# Altium PCB PCB-IO-PROTECTION-1.PcbDoc
Units mm, origin at the board's own origin, x right, y up, seen from the top; angles counter-clockwise.
Board outline 40 x 25 mm, 2 copper layers (Top Layer, Bottom Layer); 6 components, 7 nets, 30 pads, 30 vias.
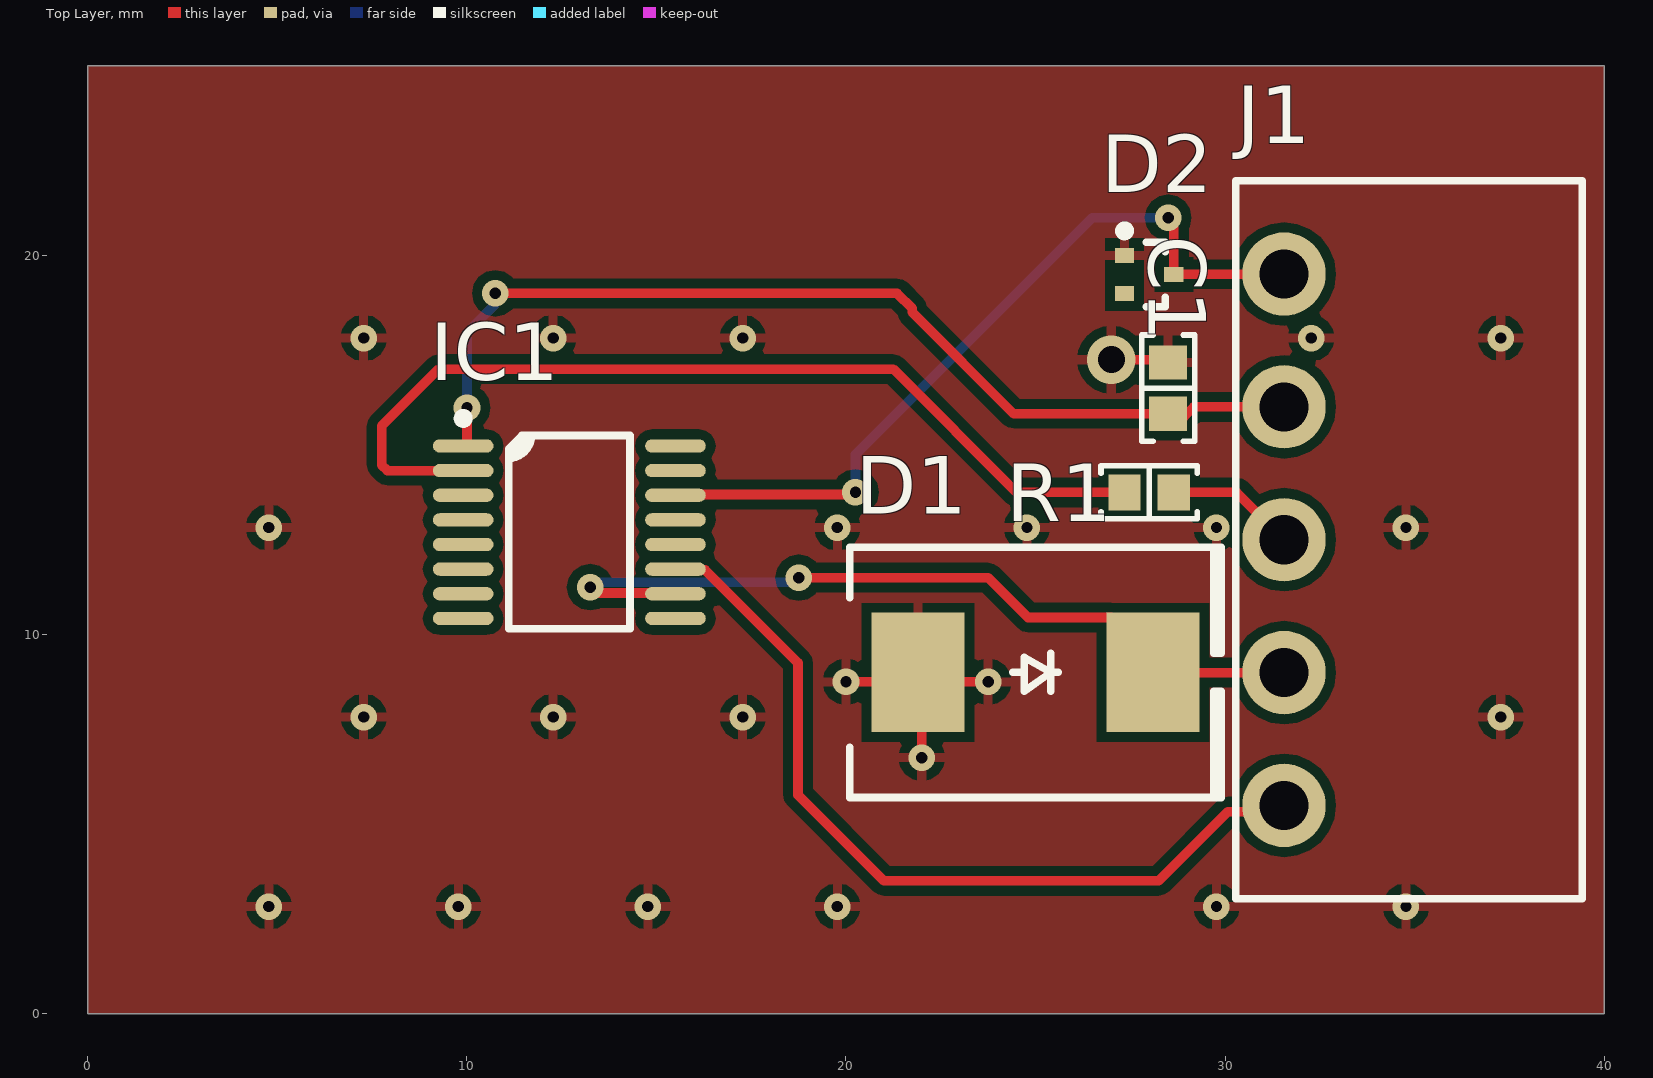
[diagram p0: Top Layer view]
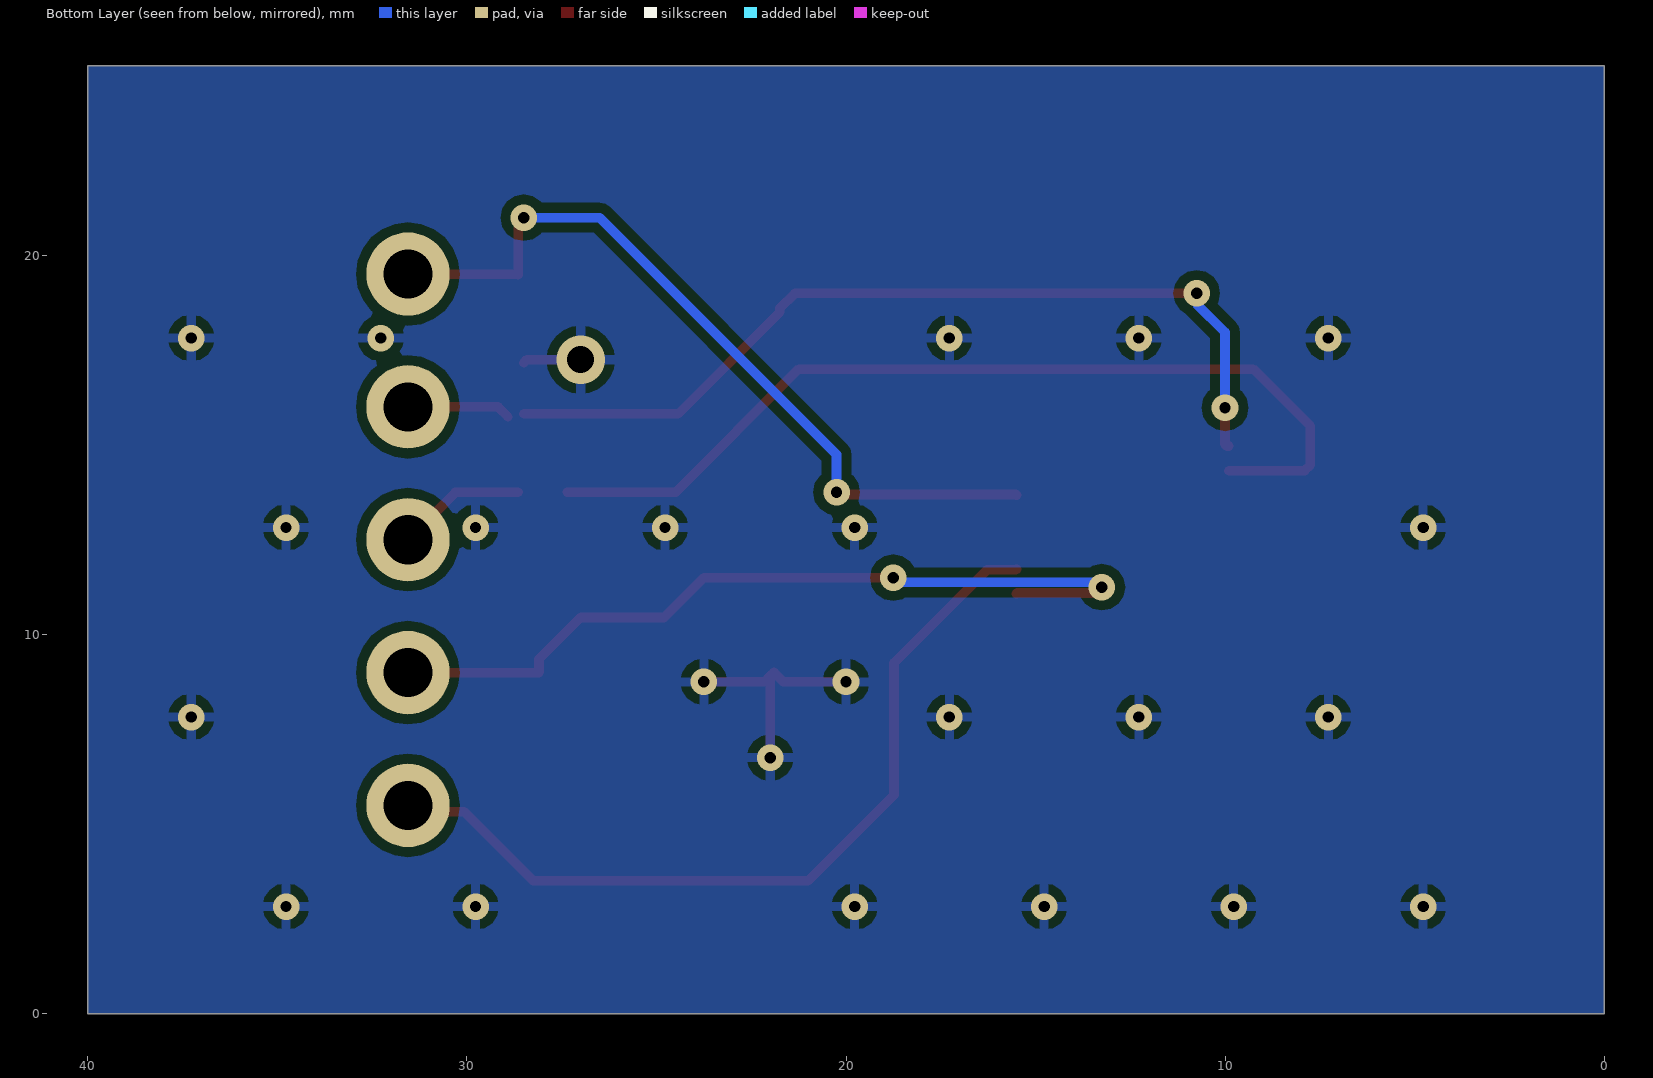
[diagram p1: Bottom Layer view, seen from below]
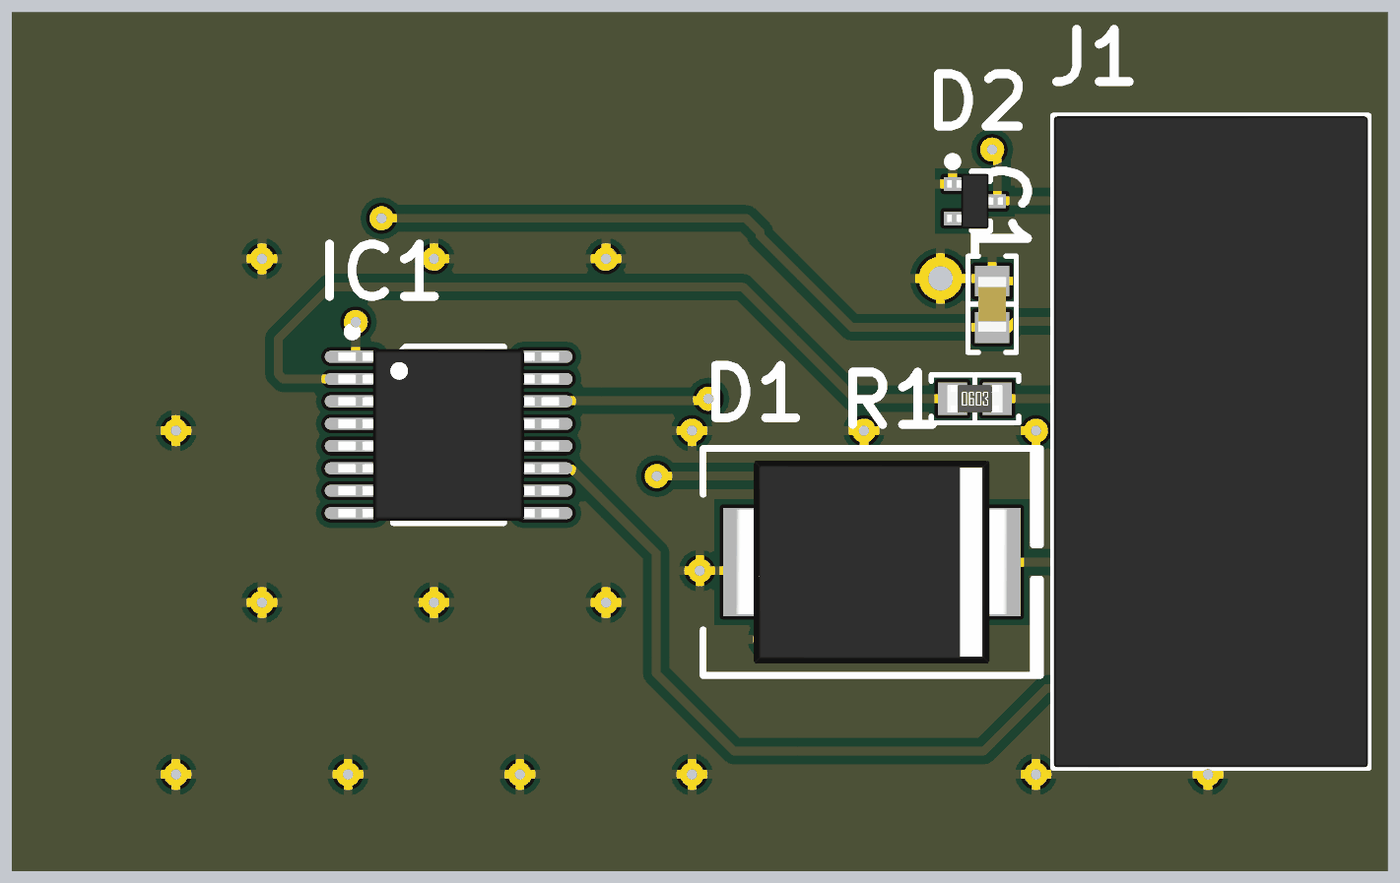
[diagram p2: 3D render of the assembled board from above, using the file's embedded part models]

## Layer stack, top to bottom
Top Solder: solder mask 0.0102, Solder Resist, Dk 3.5
Top Layer: signal copper 0.0356
Dielectric 1: dielectric 0.32, FR-4, Dk 4.8
Bottom Layer: signal copper 0.0356
Bottom Solder: solder mask 0.0102, Solder Resist, Dk 3.5

## Board outline
0,0 0,25 40,25 40,0

## Design rules (kind name [scope] priority, off if disabled: settings)
Clearance [All] p1: gap=0.254 ignorepadtopadclearanceinfootprint=FALSE except(0: Arc-Hole Track-Hole SMDPad-Hole THPad-Hole Via-Hole Fill-Hole Poly-Hole Region-Hole Text-Hole)
PolygonConnect [All] p1: connectstyle=Relief reliefconductorwidth=0.254 reliefentries=4 polygonreliefangle="90 Angle" airgapwidth=0.254
RoutingVias [All] p1: holewidth=0.711 width=1.27 viastyle="Through Hole" minholewidth=0.711 minwidth=1.27 maxholewidth=0.711 maxwidth=1.27
SolderMaskExpansion [All] p1: expansion=0.102 istentingtop=FALSE
Width [All] p1: maxlimit=0.254 minlimit=0.254 preferedwidth=0.254
30 further rules are at their usual default settings.

## Components (designator, comment, footprint, x,y, rotation, side; value= is the part's Value field where it differs from the comment)
C1 "1 µF" "CAP 0603_1608" 28.5,16.5 r270 top
D1 "5.0SMDJ130CA" "DO214AB SMC" 25,9 r0 top
D2 "BZX84C6V8T-7-F" "DIODES SOT-523" 28,19.5 r0 top
IC1 "ADS1120IPWR" "TI TSSOP-16 PW" 12.7,12.7 r0 top
J1 "0395021005" "MOLEX 395021005" 34.859,12.5 r270 top
R1 "360 Ohms" "RES 0603_1608" 28,13.75 r0 top

## Footprints (in the part's own frame and the unit in brackets; to place one, negate y for a bottom-side part, rotate by r counter-clockwise, add the part's x,y. Pads: shape width x height; smd on the part's side, far side on the other; paste and mask are expansions set on the pad)
"CAP 0603_1608" [mm] "Chip Capacitor, 2-Leads, Body 1.60x0.80mm, IPC Medium Density"
  rect 0.9x1 smd: 1(-0.675,0) 2(0.675,0)
  silkscreen extent -1.4,-0.7 1.4,0.7, body extent -0.8,-0.41 0.8,0.41, height 0.82
"DIODES SOT-523" [mm] "SOT523, 3-Leads, Body 0.8x1.60mm, Pitch 0.50mm, IPC Medium Density"
  rect 0.51x0.4 smd: 1(-0.65,0.5) 2(0.65,0) 3(-0.65,-0.5)
  silkscreen extent -0.77,-0.85 0.42,1.27, body extent -0.81,-0.8 0.81,0.8, height 0.82
"DO214AB SMC" [mm] "Molded Diode, 2-Leads, Body 6.85x5.90mm, IPC Medium Density"
  rect 2.45x3.15 smd: 1(-3.1,0) 2(3.1,0)
  silkscreen extent -4.9,-3.3 4.9,3.3, body extent -3.97,-2.95 3.97,2.95, height 2.6
"MOLEX 395021005" [mm] "5 Position Terminal Block Header, Male Pins, 3.5mm Pitch,18.95mmx9.2mm Body, 90°, Right Angle, THT"
  round 2.2 hole 1.295: 1(-7.011,-3.302) 2(-3.506,-3.302) 3(0,-3.302) 4(3.505,-3.302) 5(7.01,-3.302)
  silkscreen extent -9.47,-4.57 9.47,4.57, body extent -9.47,-4.57 9.47,4.57, height 7.11
"RES 0603_1608" [mm] "Chip Resistor, 2-Leads, Body 1.60x0.80mm, IPC Medium Density"
  rect 0.85x0.95 smd: 1(-0.65,0) 2(0.65,0)
  silkscreen extent -1.27,-0.7 1.27,0.7, body extent -0.8,-0.4 0.8,0.4, height 0.45
"TI TSSOP-16 PW" [mm] "TSSOP, 16-Leads, Body 5.00x4.40mm, Pitch 0.65mm, IPC Medium Density"
  oval 1.6x0.35 smd: 1(-2.8,2.275) 2(-2.8,1.625) 3(-2.8,0.975) 4(-2.8,0.325) 5(-2.8,-0.325) 6(-2.8,-0.975) 7(-2.8,-1.625) 8(-2.8,-2.275) 9(2.8,-2.275) 10(2.8,-1.625) 11(2.8,-0.975) 12(2.8,-0.325) 13(2.8,0.325) 14(2.8,0.975) 15(2.8,1.625) 16(2.8,2.275)
  silkscreen extent -2.92,-2.55 1.6,3.12, body extent -3.21,-2.5 3.21,2.5, height 1.2

## Part data
C1: library part C0603C105K4RACAUTO, "CAP CER 1UF 16V X7R 0603", Part Number=C0603C105K4RACAUTO
D1: "TVS DIODE 130VWM 209VC DO214AB", Part Number=5.0SMDJ130CA
D2: "DIODE ZENER 6.8V 150MW SOT523", Part Number=BZX84C6V8T-7-F
IC1: "IC ADC 16BIT SIGMA-DELTA 16TSSOP", Part Number=ADS1120IPWR
J1: "TERM BLOCK HDR 5POS 90DEG 3.5MM", Part Number=0395021005
R1: library part ERJ-PB3B3600V, "RES SMD 360 OHM 0.1% 1/5W 0603", Part Number=ERJ-PB3B3600V

## Via types
v1: diameter 0.7, hole 0.3, Top Layer to Bottom Layer, 29 vias
v2: diameter 1.27, hole 0.711, Top Layer to Bottom Layer, 1 vias

## Nets (pads, with @x,y where several pads share a name; then routed paths per layer and width w, separated by ;. In a path a pad name is that pad's centre, name@x,y a point inside that pad or via, vN(x,y) a via of type N, cw(c..) or ccw(c..) an arc to the next point about the centre after c; other vN are vias at no path point)
GND: C1.1 D1.1 D2.1 | length 7.6
  Top Layer w0.254: v1(20,8.75) 21.65,8.75 D1.1 D1.1@22,8.9 ; v1(22,6.75) D1.1@22,8.9 ; v1(23.75,8.75) 22.15,8.75 D1.1@22,8.9 ; v2(27,17.25) 28.425,17.25 C1.1
  other v1: 4.774,2.822 9.774,2.822 14.774,2.822 19.774,2.822 29.774,2.822 34.774,2.822 7.274,7.822 12.274,7.822 17.274,7.822 37.274,7.822 4.774,12.822 19.774,12.822 24.774,12.822 29.774,12.822 34.774,12.822 7.274,17.822 12.274,17.822 17.274,17.822 32.274,17.822 37.274,17.822
NetIC1_2: IC1.2 R1.1 | length 24.8
  Top Layer w0.254: IC1.2 7.899,14.325 7.75,14.474 7.75,15.5 9.25,17 21.25,17 24.5,13.75 R1.1
NOPROTECTION: IC1.11 J1.5 | length 22.3
  Top Layer w0.254: IC1.11 15.518,11.707 16.28,11.707 18.734,9.252 18.734,5.766 21,3.5 28.25,3.5 30.076,5.326 31.393,5.326 J1.5
PROTECTION_CAP: C1.2 IC1.1 J1.2 | length 26.3
  Top Layer w0.254: IC1.1 9.956,14.975 10,15.019 v1(10,15.984) ; v1(10.75,19) 21.351,19 21.75,18.601 21.75,18.5 24.425,15.825 C1.2 ; C1.2@28.925,15.75 29.181,16.006 J1.2
  Bottom Layer w0.254: v1(10,15.984) 10,17.975 10.75,18.725 v1(10.75,19)
PROTECTION_DIODE: D2.2 IC1.14 J1.1 | length 21.1
  Top Layer w0.254: IC1.14 15.518,13.693 20.193,13.693 v1(20.25,13.75) ; v1(28.5,21) 28.5,20.879 28.65,20.729 D2.2 28.655,19.505 31.552,19.505 J1.1
  Bottom Layer w0.254: v1(20.25,13.75) 20.25,14.75 26.5,21 v1(28.5,21)
PROTECTION_RES: J1.3 R1.2 | length 3.4
  Top Layer w0.254: R1.2 30.307,13.75 J1.3
PROTECTION_TVS: D1.2 IC1.10 J1.4 | length 22
  Top Layer w0.254: v1(13.25,11.25) 13.407,11.093 15.482,11.093 IC1.10 ; v1(18.75,11.5) 23.75,11.5 24.802,10.448 27.002,10.448 28.1,9.35 D1.2 28.105,8.995 J1.4
  Bottom Layer w0.254: v1(13.25,11.25) 13.375,11.375 18.625,11.375 v1(18.75,11.5)
pads on no net: D2.3 IC1.3 IC1.4 IC1.5 IC1.6 IC1.7 IC1.8 IC1.9 IC1.12 IC1.13 IC1.15 IC1.16

## Polygon pours and split planes (outlines as drawn)
GND on Top Layer "TOP_GND" (solid, pour order 0): 0,0 0,25 40,25 40,0
GND on Bottom Layer "BOT_GND" (solid, pour order 1): 0,0 0,25 40,25 40,0

## Silkscreen, mask and mechanical layers (free items; w line width, h text height)
Mechanical 1:
  the board outline again, w0.254